# Altium PCB FPGA_Board.PcbDoc (part 10 of 10)
Units mm, origin at the board's own origin, x right, y up, seen from the top; angles counter-clockwise.
Board outline 103.63 x 86.08 mm, 2 copper layers (Top Layer, Bottom Layer); 109 components, 200 nets, 667 pads, 237 vias.
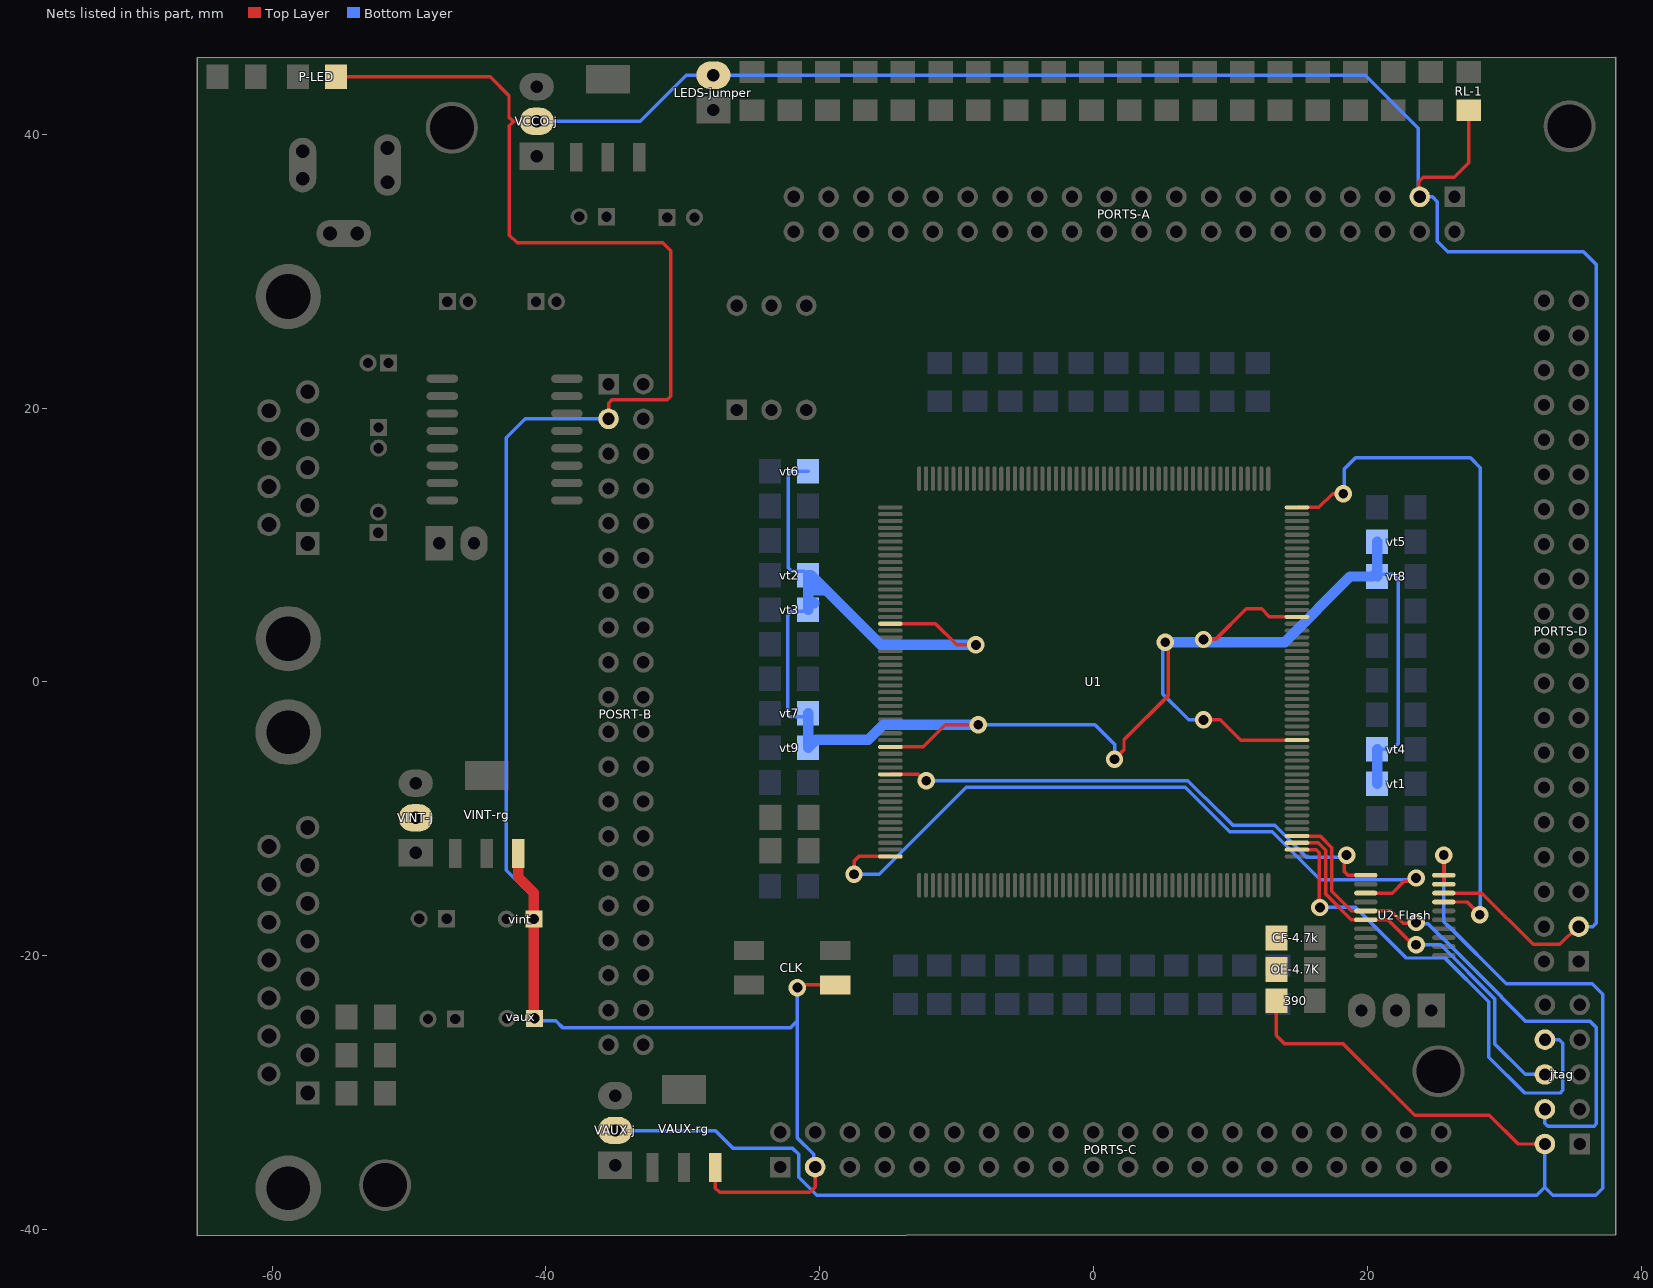
[diagram p10: the nets of this part, all layers, seen from the top]

## Via types
v1: diameter 1.27, hole 0.711, Top Layer to Bottom Layer, 237 vias

## Nets (pads, with @x,y where several pads share a name; then routed paths per layer and width w, separated by ;. In a path a pad name is that pad's centre, name@x,y a point inside that pad or via, vN(x,y) a via of type N, cw(c..) or ccw(c..) an arc to the next point about the centre after c; other vN are vias at no path point) (continued)
NetU1_70: U1.70 U1.88 U1.174 U1.192 vt1.2 vt2.2 vt3.2 vt4.2 vt5.2 vt6.2 vt7.2 vt8.2 vt9.2 | length 154.6
  Top Layer w0.254: U1.88@-14.847,-4.75 -12.45,-4.75 -10.825,-3.125 v1(-8.425,-3.125) ; U1.70@-14.847,4.25 -11.55,4.25 -10,2.7 v1(-8.6,2.7) ; v1(1.525,-5.65) 2.218,-4.957 2.218,-4.236 5.464,-0.989 5.464,2.661 v1(5.225,2.9) ; v1@7.975,-2.775 8,-2.75 9.25,-2.75 10.75,-4.25 U1.174@14.853,-4.25 ; v1(8.025,3.1) 8.9,3.1 11.136,5.336 12.268,5.336 12.834,4.77 14.833,4.77 U1.192@14.853,4.75
  Bottom Layer w0.254: vt7.2@-20.85,-2.297 -21.103,-2.55 -22.2,-2.55 -22.325,-2.425 -22.325,4.9 -22.075,5.15 -20.977,5.15 vt3.2@-20.85,5.277 ; vt2.2@-20.85,7.801 -21.124,8.075 -22.05,8.075 -22.3,8.325 -22.3,15.15 -22.075,15.375 vt6.2@-20.85,15.375 ; -15.475,-3.25 -15.35,-3.125 ; v1(-8.425,-3.125) 0.1,-3.125 1.525,-4.55 v1(1.525,-5.65) ; v1(5.225,2.9) 5.04,2.715 5.04,-0.882 6.933,-2.775 v1(8.025,-2.775) ; v1@5.6,2.9 5.8,3.1 7.825,3.1 7.925,3 v1@8.125,3 ; vt8.2@20.55,7.85 vt8.2@20.7,7.7 20.875,7.875 21.9,7.875 22.25,7.525 22.25,-4.5 21.825,-4.925 vt4.2@20.7,-4.925
  Bottom Layer w0.762: vt7.2@-20.85,-2.297 vt9.2@-20.85,-4.822 -20.266,-4.238 -16.463,-4.238 -15.475,-3.25 ; vt3.2@-20.85,5.277 -20.85,6.686 ; vt3.2@-20.483,5.73 vt3.2@-20.396,5.73 ; -15.35,-3.125 v1(-8.425,-3.125) ; v1(-8.6,2.7) -15.542,2.7 -19.528,6.686 ; v1(5.225,2.9) 5.6,2.9 13.95,2.9 18.75,7.7 20.4,7.7 vt8.2@20.55,7.85 ; v1(8.025,3.1) v1@8.125,3 ; vt1.2@20.7,-7.45 vt4.2@20.7,-4.925 ; vt8.2@20.7,7.7 vt5.2@20.7,10.225 ; -20.85,6.686 vt2.2@-20.85,7.801 -20.643,7.801 -19.528,6.686 ; -20.85,6.686 -19.528,6.686
NetU1_92: U1.92 U2-Flash.1 | length 38.9
  Top Layer w0.254: U1.92@-14.847,-6.75 -12.825,-6.75 -12.35,-7.225 v1(-12.225,-7.225) ; v1(18.475,-12.65) 18.3,-12.825 18.3,-13.85 18.575,-14.125 U2-Flash.1@19.875,-14.125
  Bottom Layer w0.254: v1(-12.225,-7.225) 6.878,-7.225 8.111,-8.457 8.157,-8.457 10.175,-10.475 13.225,-10.475 15.55,-12.8 18.325,-12.8 v1(18.475,-12.65)
NetU1_104: U1.104 U2-Flash.3 | length 54.5
  Top Layer w0.254: v1(-17.5,-14.05) -17.5,-13.093 -17.157,-12.75 U1.104@-14.847,-12.75 ; U2-Flash.3@19.875,-15.425 21.8,-15.425 22.65,-14.575 23.375,-14.575 v1@23.625,-14.325
  Bottom Layer w0.254: v1(-17.5,-14.05) -15.668,-14.05 -9.3,-7.682 6.689,-7.682 9.939,-10.932 13.036,-10.932 16.553,-14.45 23.45,-14.45 v1@23.551,-14.551
  other v1: 23.55,-14.325
NetU1_208: U1.208 U2-Flash.17 | length 51.9
  Top Layer w0.254: U1.208@14.853,12.75 16.45,12.75 17.45,13.75 v1(18.225,13.75) ; U2-Flash.17@25.575,-16.075 27.275,-16.075 v1(28.2,-17)
  Bottom Layer w0.254: v1(18.225,13.75) 18.3,13.825 18.3,15.55 19.125,16.375 27.525,16.375 28.25,15.65 28.25,-16.95 v1(28.2,-17)
TCK: jtag.6 U1.159 U2-Flash.6 | length 29
  Top Layer w0.254: U1.159@14.853,-11.75 16.4,-11.75 16.943,-12.293 16.943,-15.493 18.825,-17.375 U2-Flash.6@19.875,-17.375 21.5,-17.375 23.325,-19.2 v1(23.55,-19.2) v1@23.675,-19.2
  Bottom Layer w0.254: v1(23.55,-19.2) 25.347,-19.2 29.311,-23.164 29.311,-26.461 31.52,-28.67 jtag.6@32.96,-28.67
TDO: jtag.8 U1.158 | length 37.2
  Top Layer w0.254: U1.158@14.853,-12.25 16.253,-12.25 16.486,-12.482 16.486,-16.436 v1(16.525,-16.475)
  Bottom Layer w0.254: jtag.8@32.96,-26.13 34.006,-26.13 34.276,-26.4 34.276,-29.83 34.081,-30.025 31.475,-30.025 28.853,-27.403 28.853,-23.353 25.665,-20.165 22.84,-20.165 19.15,-16.475 v1(16.525,-16.475) ; v1(16.525,-16.475) 16.2,-16.475 16.375,-16.65 16.525,-16.5 v1(16.525,-16.475)
TMS: jtag.4 U1.160 U2-Flash.5 | length 41.7
  Top Layer w0.254: U1.160@14.853,-11.25 14.873,-11.27 16.566,-11.27 17.4,-12.103 17.4,-15.303 18.822,-16.725 U2-Flash.5@19.875,-16.725 21.7,-16.725 22.6,-17.625 23.5,-17.625 v1(23.55,-17.575)
  Bottom Layer w0.254: v1(23.55,-17.575) 23.643,-17.668 24.425,-17.668 25.5,-18.743 25.536,-18.743 29.768,-22.975 29.768,-23.011 31.557,-24.8 36.278,-24.8 36.717,-25.239 36.717,-32.283 36.55,-32.45 33.187,-32.45 32.96,-32.223 jtag.4@32.96,-31.21 jtag.4@32.96,-31.065
VCCAUX: 390.1 CF-4.7k.1 jtag.2 OE-4.7K.1 U2-Flash.19 U2-Flash.20 VAUX-j.2 | length 139.3
  Top Layer w0.254: 390.1@13.35,-23.275 13.35,-25.825 13.968,-26.443 18.239,-26.443 23.447,-31.65 28.9,-31.65 31,-33.75 jtag.2@32.96,-33.75 ; v1(25.564,-12.65) 25.575,-12.661 U2-Flash.20@25.575,-14.125 U2-Flash.19@25.575,-14.775
  Bottom Layer w0.254: VAUX-j.2@-34.95,-32.76 -34.935,-32.775 -27.621,-32.775 -26.321,-34.075 -21.967,-34.075 -21.538,-34.504 -21.538,-36.175 -20.209,-37.504 32.373,-37.504 32.96,-36.917 ; v1(25.564,-12.65) 25.564,-17.514 25.878,-17.828 25.915,-17.828 30.128,-22.042 36.413,-22.042 37.174,-22.802 37.174,-36.975 36.664,-37.485 33.528,-37.485 32.96,-36.917 ; jtag.2@32.96,-33.75 32.96,-36.917
VCCINT: VINT-j.2
VCCO: CLK.4 LEDS-jumper.2 P-LED.1 PORTS-A.3 PORTS-C.3 PORTS-D.3 POSRT-B.3 RL-1.2 U2-Flash.18 VAUX-rg.3 vaux.1 VCCO-j.2 VINT-rg.3 vint.1 | length 318.2
  Top Layer w0.254: P-LED.1@-55.325,44.2 -44.075,44.2 -42.7,42.825 -42.7,41.25 -42.39,40.94 ; VCCO-j.2@-40.678,40.94 -42.39,40.94 ; POSRT-B.3@-35.429,19.21 -35.429,20.349 -35.178,20.6 -31.152,20.6 -30.877,20.875 -30.877,31.485 -31.46,32.068 -42.112,32.068 -42.675,32.631 -42.675,40.625 -42.39,40.91 -42.39,40.94 ; LEDS-jumper.2@-27.882,44.2 LEDS-jumper.2@-27.772,44.31 ; VAUX-rg.3@-27.625,-35.475 -27.625,-36.97 -27.32,-37.275 -20.73,-37.275 -20.342,-36.887 PORTS-C.3@-20.342,-35.435 PORTS-C.3@-20.603,-35.174 ; v1@-21.78,-22.275 -21.78,-22.435 -21.648,-22.567 -21.206,-22.125 CLK.4@-18.875,-22.125 ; PORTS-A.3@23.744,35.742 PORTS-A.3@23.7,35.786 ; PORTS-A.3@23.82,35.429 23.7,35.549 PORTS-A.3@23.7,35.786 ; 24.073,36.851 24.072,36.85 ; U2-Flash.18@25.575,-15.425 28.35,-15.425 32.1,-19.175 34.05,-19.175 35.35,-17.875 PORTS-D.3@35.433,-17.875 ; RL-1.2@27.388,41.75 27.388,37.913 26.325,36.85 24.072,36.85 ; PORTS-A.3@23.7,35.786 23.749,35.835 23.749,36.525 23.747,36.525 24.072,36.85
  Top Layer w0.762: VINT-rg.3@-42.032,-12.54 -42.032,-14.268 -40.888,-15.412 vint.1@-40.888,-17.325 -40.888,-24.52 vaux.1@-40.833,-24.575
  Bottom Layer w0.254: vint.1@-40.888,-17.325 -40.843,-17.28 -40.843,-15.8 -42.889,-13.754 -42.889,17.825 -41.504,19.21 POSRT-B.3@-35.429,19.21 ; vaux.1@-40.833,-24.575 -40.658,-24.75 -39.281,-24.75 -38.756,-25.275 -22.173,-25.275 -21.648,-24.75 ; VCCO-j.2@-40.678,40.94 -33.119,40.94 -29.749,44.31 LEDS-jumper.2@-27.772,44.31 19.849,44.31 23.718,40.441 23.718,35.531 PORTS-A.3@23.82,35.429 24.746,35.429 25.1,35.075 25.1,32.175 25.85,31.425 35.775,31.425 36.693,30.507 36.693,-17.625 36.443,-17.875 PORTS-D.3@35.433,-17.875 ; v1(-21.637,-22.325) -21.648,-22.336 -21.648,-24.75 ; PORTS-C.3@-20.342,-35.435 -20.449,-35.328 -20.449,-34.509 -21.648,-33.31 -21.648,-24.75
pads on no net: CLK.1 J1.9 jtag.1 POSRT-B.39 POSRT-B.40 U2-Flash.2 U2-Flash.9 U2-Flash.12 U2-Flash.13 U2-Flash.14 U2-Flash.15 U2-Flash.16 VGA.4 VGA.5 VGA.9 VGA.12 VGA.15
copper on no net: | length 261.2
  Top Layer w0.254: -50.063,-39.095 cw(c-51.734,-36.809) -49.916,-38.98 ; -45.279,38.161 cw(c-46.935,40.458) -44.985,38.404 ; -13.576,3.207 -13.617,3.248 -13.617,3.67 -13.617,3.726 -13.617,3.793 ; -13.409,3.561 -11.508,3.561 -10.189,2.243 -9.508,2.243 -9.228,1.963 -9.533,1.658 -9.533,1.382 -10.311,1.382 -10.348,1.42 -12.136,3.207 -13.506,3.207 -13.506,3.682 -13.617,3.793 ; -10.037,3.417 -9.789,3.665 -8.37,3.665 -8.075,3.96 -8.2,3.96 -8.25,3.91 ; 4.638,-1.152 4.638,-0.998 4.804,-0.832 4.804,1.956 4.825,1.935 5.007,1.935 5.007,-0.8 4.632,-1.175 4.632,2.128 4.728,2.032 4.728,-0.64 ; 8.62,-3.743 9.596,-3.743 10.146,-4.293 8.99,-4.293 8.99,-4.275 8.44,-3.725 8.958,-3.207 9.032,-3.207 9.061,-3.207 9.852,-3.999 9.688,-4.163 9.019,-4.163 8.66,-3.804 9.468,-3.804 9.647,-3.983 8.925,-3.983 8.921,-3.979 8.921,-3.519 9.011,-3.429 9.251,-3.669 8.632,-3.669 8.628,-3.665 ; 8.858,4.519 9.672,4.519 10.489,5.336 9.055,5.336 8.99,5.271 8.99,4.9 8.425,4.335 7.625,4.335 7.54,4.42 7.517,4.42 7.517,3.957 ; 13.277,3.631 13.277,3.74 13.258,3.759 13.258,3.882 13.238,3.902 13.031,4.109 13.031,4.144 12.853,4.144 12.764,4.055 13.169,3.65 13.169,3.399 13.361,3.399 13.381,3.419 13.406,3.444 13.406,4.001 13.094,4.313 12.644,4.313 ; 13.504,3.572 12.92,3.572 12.59,3.902 12.59,4.367 ; 13.518,-3.457 10.604,-3.457 10.354,-3.207 13.486,-3.207 13.486,-3.793 10.939,-3.793 10.532,-3.385 10.456,-3.309 10.523,-3.309 10.855,-3.641 13.375,-3.641 13.4,-3.616 13.547,-3.469 13.547,-3.207 13.587,-3.247 13.587,-3.793 13.623,-3.757 13.623,-3.207 12.953,-3.207 13.539,-3.793 ; 25.618,-31.157 cw(c25.237,-28.384) 25.764,-31.133 ; 33.095,42.952 ccw(c34.68,40.606) 33.269,43.061 ; -13.617,3.793 -13.44,3.616 -13.44,3.207 -13.617,3.207 -13.617,3.701 -13.558,3.642 -13.558,3.213 -13.617,3.272 -13.617,3.611 -13.374,3.368 -11.678,3.368 -11.678,3.158 -10.087,1.567 -10.157,1.567 -10.725,2.135 -12.011,3.421 -11.643,3.421 -11.573,3.351 -10.008,1.786 -9.65,1.786 -9.694,1.742 -10.043,1.742 -9.868,1.567 -9.711,1.567 -9.493,1.785 -9.493,2.004 -9.951,2.004 -11.737,3.791 -11.739,3.793 -13.617,3.793 ; -9.811,3.157 -9.508,3.157 ; -9.811,3.157 -10.934,4.281 -10.946,4.293 -9.433,4.293 -9.05,3.91 ; -9.811,3.157 -9.679,3.289 -9.679,3.608 -9.56,3.489 -9.56,3.393 -9.763,3.393 -10.593,4.223 -10.378,4.223 -9.96,3.805 -9.96,3.918 -9.895,3.853 -9.524,3.853 -9.292,3.853 -9.172,3.733 -9.56,3.345 -9.661,3.345 -9.709,3.345 -10.414,4.05 -9.255,4.05 -9.19,4.05 -9.05,3.91 ; -9.508,3.157 -9.508,3.235 -8.879,3.864 -8.925,3.91 -9.05,3.91 ; -9.508,3.157 -9.198,3.467 -9,3.665 -8.2,3.665 -8.075,3.54 -8.075,4.085 -8.25,3.91 ; -9.508,3.157 -9.751,3.157 -10.887,4.293 -9.445,4.293 -9.375,4.223 -9.062,3.91 -8.25,3.91 ; -9.05,3.91 -8.25,3.91 ; 7.517,3.957 7.517,4.323 7.636,4.204 7.649,4.217 8.622,4.217 8.635,4.204 9.187,4.204 8.957,3.974 8.76,3.974 8.668,4.066 8.517,4.066 8.517,4.263 9.003,4.749 8.912,4.749 8.55,4.387 9.41,4.387 10.192,5.169 10.113,5.169 9.929,4.985 9.64,4.985 9.292,4.985 9.272,4.965 9.318,4.919 9.318,4.86 9.705,4.86 9.738,4.893 10.014,5.169 9.22,5.169 9.128,5.077 9.128,4.762 9.075,4.709 9.088,4.696 9.85,4.696 8.864,3.71 8.779,3.71 8.425,4.065 7.625,4.065 7.517,3.957 ; 12.59,4.367 12.644,4.313 ; 12.59,4.367 12.59,3.922 12.59,3.781 12.992,3.38 13.164,3.207 13.578,3.207 13.578,4.141 13.406,4.313 12.644,4.313 ; 12.59,4.367 12.644,4.313
  Bottom Layer w0.254: -54.3,-38.009 cw(c-51.745,-36.789) -54.211,-38.18 ; -49.665,39.645 cw(c-46.952,40.454) -49.624,39.518 ; 22.731,-27.081 ccw(c25.226,-28.42) 22.769,-27.013 ; 35.448,37.897 cw(c34.684,40.623) 35.634,37.956

## Polygon pours and split planes (outlines as drawn)
GND on Top Layer "Bottom Layer-No Net" (solid, remove dead copper, pour order 2): -65.106,45.415 37.747,45.415 37.747,-39.777 37.374,-40.15 -65.23,-40.15 -65.23,45.167 -64.982,45.415
GND on Top Layer "Bottom Layer-No Net" (solid, remove dead copper, pour order 0): -65.262,45.664 37.995,45.664 37.995,-40.057 38.026,-40.088 37.995,-40.119 -65.044,-40.119 -65.254,-39.909 -65.254,45.66 -65.223,45.66 -65.219,45.664
GND on Bottom Layer "Bottom Layer-No Net" (solid, remove dead copper, pour order 4): -65.184,45.54 -65.169,45.555 37.902,45.555 37.902,-40.118 37.918,-40.134 37.903,-40.119 -65.184,-40.119 -65.184,45.539 -65.168,45.555

## Keep-outs
Keep-Out Layer:
  lines w0.254: -65.482,-40.325 38.098,-40.325 38.098,45.857 ; -65.482,-40.275 -65.482,45.6 ; -65.482,45.85 38.046,45.85

## Other copper
Top Layer:
  rectangle net GND: -42.317,32.879 -37.355,39.321
  rectangle net GND: 31.093,28.91 31.958,29.5
  rectangle net GND: 27.536,26.677 28.573,27.225
  rectangle net GND: 29.944,29.518 36.871,32.726
  rectangle net GND: -9.247,-13.522 -5.65,-10.775
  rectangle net GND: -0.847,-13.628 1.753,-10.115
  rectangle net GND: 5.538,4.034 6.46,4.832
  rectangle net GND: 5.075,11.347 9.253,13.7
  rectangle net GND: 11.125,10.925 13.625,13.725
  rectangle net GND: 2.063,4.977 2.943,6.138
  rectangle net GND: -27.515,21.801 -17.631,26.491
  rectangle net GND: 13.91,19.324 27.566,23.902
  rectangle net GND: 11.325,9.35 13.45,9.375
  rectangle net GND: 11.15,9.375 13.45,9.775
  rectangle net GND: 2.1,11.35 4.375,13.675
  rectangle net VCCAUX: 12.55,-24.025 14.15,-17.825
  rectangle net NetP-LED_2: -62,43.275 -57.35,45.075
  rectangle net NetLED10_1: -25.875,43.7 -21.275,45.35
  rectangle net NetLED9_1: -20.35,43.75 -15.7,45.325
  rectangle net NetLED8_1: -14.825,43.675 -10.25,45.35
  rectangle net NetLED7_1: -9.325,43.75 -4.75,45.35
  rectangle net NetLED6_1: -3.85,43.775 0.675,45.375
  rectangle net NetLED5_1: 1.7,43.775 6.25,45.35
  rectangle net NetLED4_1: 7.225,43.725 11.775,45.35
  rectangle net NetLED3_1: 12.725,43.725 17.3,45.35
  rectangle net NetLED2_1: 18.225,43.775 22.775,45.35
  rectangle net NetLED1_1: 23.7,43.775 28.275,45.35
  rectangle net NetLEDS-jumper_1: -28.725,40.95 -24.1,42.55
  rectangle net GND: 11.25,7.175 13.575,7.425
  rectangle net GND: 11.125,9.15 13.288,9.475
  rectangle net GND: -41.789,37.475 -37.367,39.375
  rectangle net NetCCO-rg_2: -35.904,39.325 -35.013,43.125
  rectangle net NetCCO-rg_2: -35.915,34.15 -35.035,37.425
  rectangle net GND: -37.983,33.775 -37.334,37.7
  rectangle net NetRED_2: -58.234,-30.85 -53.669,-29.175
  rectangle net GND: -50.369,-13.45 -46.189,-11.475
  rectangle net Netoint_1: -44.792,-11.775 -43.89,-7.175
  rectangle net Netoint_1: -49.995,-7.9 -43.89,-6.575
  rectangle net NetCCO-rg_2: -41.239,43.025 -35.761,44.225
  rectangle net Neto-aux_1: -35.75,-30.85 -28.369,-29.45
  rectangle net GND: -35.75,-36.275 -31.768,-34.45
  rectangle net VCCAUX: 24.717,-15 26.422,-13.925
  rectangle net GND: -0.975,10.825 0.7,11.6
  rectangle net GND: -2.25,11.325 -1.725,11.425
  rectangle net GND: -0.9,10.575 0.55,10.925
  rectangle net GND: -1.85,9.375 -0.625,11.725
  rectangle net GND: -1.025,10.25 0.225,10.625
  rectangle net GND: -0.825,9.925 -0.075,10.325
  rectangle net GND: -1.725,9.075 -0.975,9.625
  rectangle net GND: -3.75,9.375 -1.85,9.65
  rectangle net GND: -4.725,8.9 -3.625,12.025
  rectangle net GND: -4.9,9.4 -4.65,11.725
  rectangle net GND: -3.925,9.05 -3.6,11.375
  rectangle net GND: -7.025,9.425 -4.8,9.625
  rectangle net GND: -7.075,9.7 -6.75,11.425
  rectangle net GND: -7.075,9.175 -6.55,9.7
  rectangle net GND: -7.425,8.8 -6.85,9.825
  rectangle net GND: -6.95,8.575 -1.325,9.45
  rectangle net GND: -7.425,8.575 -6.95,8.9
  rectangle net GND: -10.05,9.075 -7.25,9.25
  rectangle net GND: -10.85,12.75 -10.175,13.65
  rectangle net GND: -10.875,7 -9.85,9.75
  rectangle net GND: -12.575,12.725 -11.725,13.65
  rectangle net GND: -13.55,7.05 -13.025,8.3
  rectangle net GND: 8.95,9.625 13.65,11.125
  rectangle net GND: 9.049,6.125 13.574,7.2
  rectangle net GND: 5.675,9.275 11.4,11.375
  rectangle net GND: 9.05,6.2 11.325,9.35
  rectangle net GND: -2.25,11.425 1.25,13.5
  rectangle net GND: 1.43,-11.054 6.583,-10.395
  rectangle net GND: -3.663,-11.074 -0.837,-8.068
  rectangle net GND: 1.42,-11.204 1.909,-10.824
  rectangle net GND: -5.35,11.325 -3.125,13.525
  rectangle net GND: -7.247,13.45 -6.1,13.625
  rectangle net GND: -7.275,13.275 -6.1,13.597
  rectangle net GND: -7.275,11.5 -6.1,13.275
  rectangle net GND: -7.775,11.325 -6.1,11.55
  rectangle net GND: -10.275,9.25 -6.825,11.575
  rectangle net GND: -10.247,9.55 -7.275,10.378
  rectangle net GND: -13.65,5.125 -9.725,7.525
  rectangle net GND: -13.4,10.675 -12.2,13.575
  rectangle net GND: -11.101,-6.902 -7.943,-6.068
  rectangle net GND: -13.309,-6.317 -9.186,-5.761
  rectangle net GND: -9.237,-10.775 -5.65,-9.3
  rectangle net GND: -11.16,-6.448 -10.619,-6.156
  rectangle net GND: -56.648,-17.587 -49.512,-14.112
  rectangle net GND: -55.166,-15.094 -49.825,-12.787
  rectangle net GND: -56.249,-21.318 -48.914,-17.145
  rectangle net GND: -56.06,-22.657 -48.7,-21.03
  rectangle net GND: -48.514,-23.654 -42.414,-18.55
  rectangle net GND: -50.568,-29.625 -47.615,-22.37
  rectangle net GND: -48.642,-29.593 -42.768,-26.618
  rectangle net GND: -45.614,-27.923 -43.945,-23.033
  rectangle net GND: -44.362,-26.554 -42.768,-25.419
  rectangle net GND: -48.193,-26.597 -44.501,-25.569
  rectangle net GND: -44.383,-26.923 -42.373,-22.165
  rectangle net GND: -42.532,-34.226 -39.365,-25.655
  rectangle net GND: -41.954,-35.393 -32.998,-34.914
  rectangle net GND: -48.055,-12.182 -45.414,-8.826
  rectangle net GND: -64.757,-0.986 -37.219,5.932
  rectangle net GND: -63.534,21.269 -55.831,36.624
  rectangle net GND: -64.034,25.836 -53.608,43.069
  rectangle net GND: -64.585,37.33 -63.362,38.646
  rectangle net GND: -54.754,29.339 -43.019,34.533
  rectangle net GND: -56.346,24.979 -48.1,29.453
  rectangle net GND: -64.894,9.016 -62.028,21.672
  rectangle net GND: -63.398,7.956 -61.34,20.699
  rectangle net GND: -43.473,28.894 -31.816,31.225
  rectangle net GND: 14.122,15.571 18.83,18.963
  rectangle net GND: 15.716,13.784 16.647,15.742
  rectangle net GND: 16.337,14.886 19.418,15.742
  rectangle net GND: 18.284,15.347 19.568,17.187
  rectangle net GND: 13.183,13.764 15.738,15.389
  rectangle net GND: 15.631,14.63 17.118,15.186
  rectangle net GND: 16.187,14.052 17.054,15.24
  rectangle net GND: 12.934,15.268 14.66,16.449
  rectangle net GND: 12.964,15.461 13.533,17.029
  rectangle net GND: 12.753,15.268 14.66,16.818
  rectangle net GND: 21.173,15.294 27.327,20.373
  rectangle net GND: 20.691,9.338 27.082,15.77
  rectangle net GND: 20.75,8.071 25.779,9.935
  rectangle net GND: -19.523,19.315 -10.237,24.788
  rectangle net GND: -19.877,12.618 -16.086,20.527
  rectangle net GND: -20.571,21.045 -18.193,21.928
  rectangle net GND: -20.006,20.339 -19.382,21.175
  rectangle net GND: -22.937,15.078 -17.593,18.562
  rectangle net GND: -31.823,35.371 -24.176,39.176
  rectangle net GND: -29.532,30.864 -24.102,35.777
  rectangle net GND: -24.545,31.196 -23.317,35.103
  rectangle net GND: -26.171,30.162 -21.849,30.975
  rectangle net GND: -26.91,30.273 -24.915,30.605
  rectangle net GND: -26.725,30.199 -25.838,31.049
  rectangle net GND: -29.791,33.339 -27.722,35.666
  region net GND: -13.275,11.025 -13.225,11.075 -10,11.075 -10,9.425 -10.325,9.75 -13.375,9.75 -13.375,10.9 -13.25,11.025
  region net GND: -10.3,13.725 -10.2,13.625 -7.247,13.625 -7.247,10.278 -7.275,10.25 -7.403,10.378 -10.247,10.378 -10.247,13.722 -10.275,13.75
  region net GND: 0.688,11.312 0.688,10.637 -1.262,8.687 -1.325,8.575 -1.338,8.687 -1.338,9.287 0.687,11.312
  text "VCCO" at -30.227,40.178 h1.27 r90
  text "A" at 28.787,36.033 h1.52
  text "M0" at -26.595,28.691 h0.76
  text "M1" at -23.99,28.691 h0.76
  text "M2" at -21.68,28.651 h0.76
  text "B" at -36.036,24.606 h1.52
  text "T" at -48.061,7.635 h0.76
  text "R" at -45.452,7.645 h0.76
  text "VCCINT" at -39.276,-13.328 h1.27 r90
  text "D" at 30.196,-23.145 h1.52
  text "G" at 26.296,-24.527 h1.02
  text "VCCAUX" at -37.567,-34.44 h1.27 r90
  text "C" at -25.652,-36.332 h1.52
Bottom Layer:
  rectangle net GND: 26.201,35.083 31.483,41.182
  rectangle net GND: 24.389,38.528 31.509,44.831
  rectangle net GND: 28.467,33.303 37.647,36.933
  rectangle net GND: -38.139,-39.924 37.497,-38.16
  rectangle net GND: -41.891,-5.473 -37.054,13.199
  rectangle net GND: -52.775,-33.529 -49.563,-22.227
  rectangle net GND: -62.715,-26.771 -59.045,-21.939
  rectangle net GND: -58.11,-17.246 -55.906,-9.079
  rectangle net GND: -63.551,-8.883 -54.834,-6.255
  rectangle net GND: -27.515,21.82 -17.613,26.491
  rectangle net GND: 13.936,19.272 27.514,23.954
  rectangle net NetU1_70: 19.975,6.875 21.45,11.075
  rectangle net NetU1_6: 19.95,1.8 21.425,6.025
  rectangle net NetU1_17: 19.9,-3.25 21.425,0.975
  rectangle net NetU1_70: 19.9,-8.25 21.475,-4.1
  rectangle net NetU1_6: 19.875,-13.35 21.45,-9.1
  rectangle net GND: -24.45,-15.825 -22.85,16.225
  rectangle net GND: -12.1,22.525 12.85,24.1
  rectangle net GND: -14.525,-24.325 14.375,-22.725
  rectangle net NetU1_6: -12.15,19.675 -7.775,21.3
  rectangle net NetU1_17: -6.95,19.7 -2.6,21.3
  rectangle net NetU1_6: -1.825,19.7 2.475,21.3
  rectangle net NetU1_17: 3.325,19.675 7.675,21.3
  rectangle net NetU1_6: 8.5,19.7 12.875,21.3
  rectangle net NetU1_6: -21.65,9.475 -20.05,13.75
  rectangle net NetU1_70: -21.65,4.425 -20.05,8.65
  rectangle net NetU1_6: -21.65,-0.625 -20.05,3.6
  rectangle net NetU1_70: -21.65,-5.675 -20.05,-1.425
  rectangle net NetU1_17: -21.65,-10.775 -20.05,-6.45
  rectangle net NetU1_6: -21.625,-15.775 -20.025,-11.5
  rectangle net NetU1_6: -14.65,-21.525 -10.3,-19.925
  rectangle net NetU1_17: -9.7,-21.525 -5.425,-19.925
  rectangle net NetU1_6: -4.75,-21.525 -0.425,-19.925
  rectangle net NetU1_17: 0.2,-21.525 4.45,-19.925
  rectangle net NetU1_6: 5.2,-21.525 9.425,-19.925
  rectangle net NetU1_17: 10.075,-21.525 14.4,-19.925
  rectangle net GND: 22.7,-13.3 24.3,13.575
  rectangle net GND: -25.823,36.884 19.603,43.906
  rectangle net GND: -65.141,24.376 -53.579,45.498
  rectangle net GND: -54.689,29.002 -42.831,34.736
  rectangle net GND: -54.138,24.3 -49.024,31.342
  rectangle net GND: -49.696,11.78 -43.807,25.26
  rectangle net GND: -65.14,-6.085 -43.872,7.853
  rectangle net GND: -56.175,-32.392 -51.267,-4.449
  rectangle net GND: -65.14,3.534 -62.13,25.522
  rectangle net GND: -64.86,-39.524 -62.064,-4.842
  rectangle net GND: -62.942,-39.545 -54.928,-33.399
  rectangle net GND: -52.175,-23.603 -45.058,-18.699
  rectangle net GND: -48.382,-40.111 -36.762,-31.331
  rectangle net GND: -19.254,-31.443 21.848,-27.441
  rectangle net GND: -30.774,-19.058 -23.635,16.203
  rectangle net GND: -29.259,22.693 28.554,28.859
  rectangle net GND: -38.402,24.496 -31.753,32.589
  rectangle net GND: -32.29,24.463 -27.555,28.828
  rectangle net GND: -31.652,22.146 -29.167,29.332
  rectangle net GND: -29.772,21.037 -12.612,24.295
  rectangle net GND: 13.254,18.573 28.695,23.644
  rectangle net GND: 12.775,13.022 17.316,19.077
  rectangle net GND: 22.73,-7.735 27.423,15.954
  rectangle net GND: -15.395,-26.373 18.082,-22.619
  rectangle net GND: 27.561,29.051 35.472,30.905
  rectangle net GND: 27.563,25.997 29.944,29.896
  rectangle net GND: -28.222,30.308 -23.726,38.336
  rectangle net GND: -38.52,36.822 -24.69,40.171
  rectangle net GND: -43.382,36.868 -36.708,39.368
  rectangle net GND: -55.011,43.795 -42.19,45.469
  rectangle net GND: 9.317,-3.955 13.791,0.508

## Silkscreen, mask and mechanical layers (free items; w line width, h text height)
Top Overlay:
  lines w0.254: -52.9,-39.4 cw(c-51.748,-36.814) -52.704,-39.479 ; -48.1,37.875 cw(c-46.948,40.461) -47.904,37.796 ; 24.082,-30.987 cw(c25.235,-28.401) 24.278,-31.066 ; 33.566,38.036 cw(c34.718,40.622) 33.762,37.957
  text "Designed       by /  Milad Pourtaghi" at -54.858,-4.621 h1.52

## Text inside footprints (layer, text, board x,y; h text height)
C1: Top Overlay "+" at -51.75,25.48 h1.5 r180
C2: Top Overlay "+" at -54.175,18.35 h1.5 r270
C3: Top Overlay "+" at -40.305,25.695 h1.5
C4: Top Overlay "+" at -46.833,25.595 h1.5
C5: Top Overlay "+" at -50.21,11.65 h1.5 r90
J1: Top Overlay "6" at -63.347,10.995 h1.5 r90; Top Overlay "9" at -63.347,19.305 h1.5 r90; Top Overlay "5" at -56.742,23.23 h1.5 r90; Top Overlay "1" at -56.702,7.59 h1.5 r90
jtag: Top Overlay "10" at 31.42,-24.73 h1.27 r90; Top Overlay "9" at 38.36,-24.15 h1.27 r90; Top Overlay "1" at 38.391,-34.025 h1.27 r90; Top Overlay "2" at 31.383,-32.575 h1.27 r90
o-aux: Top Overlay "+" at -47.259,-25.505 h1.5 r180
oint: Top Overlay "+" at -47.777,-14.88 h1.5 r180
PORTS-A: Top Overlay "1" at 28.9,35.937 h1.27 r180; Top Overlay "2" at 28.9,33.397 h1.27 r180; Top Overlay "40" at -21.06,30.909 h1.27 r180; Top Overlay "39" at -19.12,38.549 h1.27 r180
PORTS-C: Top Overlay "1" at -24.442,-36.175 h1.27; Top Overlay "2" at -21.982,-33.555 h1.27; Top Overlay "40" at 23.447,-31.225 h1.27; Top Overlay "39" at 24.148,-38.4 h1.27
PORTS-D: Top Overlay "1" at 38.32,-20.659 h1.27 r90; Top Overlay "2" at 31.6,-20.899 h1.27 r90; Top Overlay "40" at 33.401,29.877 h1.27 r90; Top Overlay "39" at 35.941,29.877 h1.27 r90
POSRT-B: Top Overlay "1" at -34.989,23.21 h1.27 r270; Top Overlay "2" at -33.397,24.29 h1.27 r270; Top Overlay "40" at -30.949,-24.11 h1.27 r270; Top Overlay "39" at -38.649,-23.13 h1.27 r270
vaux: Top Overlay "+" at -41.393,-25.375 h1.5 r180
Vcco: Top Overlay "+" at -36.295,32.955 h1.5 r180
VCCO-in: Top Overlay "+" at -30.431,34.825 h1.5
VGA: Top Overlay "9" at -63.347,-29.135 h1.5 r90; Top Overlay "15" at -63.347,-13.14 h1.5 r90; Top Overlay "8" at -57.022,-8.845 h1.5 r90; Top Overlay "1" at -56.542,-32.485 h1.5 r90
vint: Top Overlay "+" at -41.728,-18.105 h1.5 r180